# Allegro board CLAYR6.brd
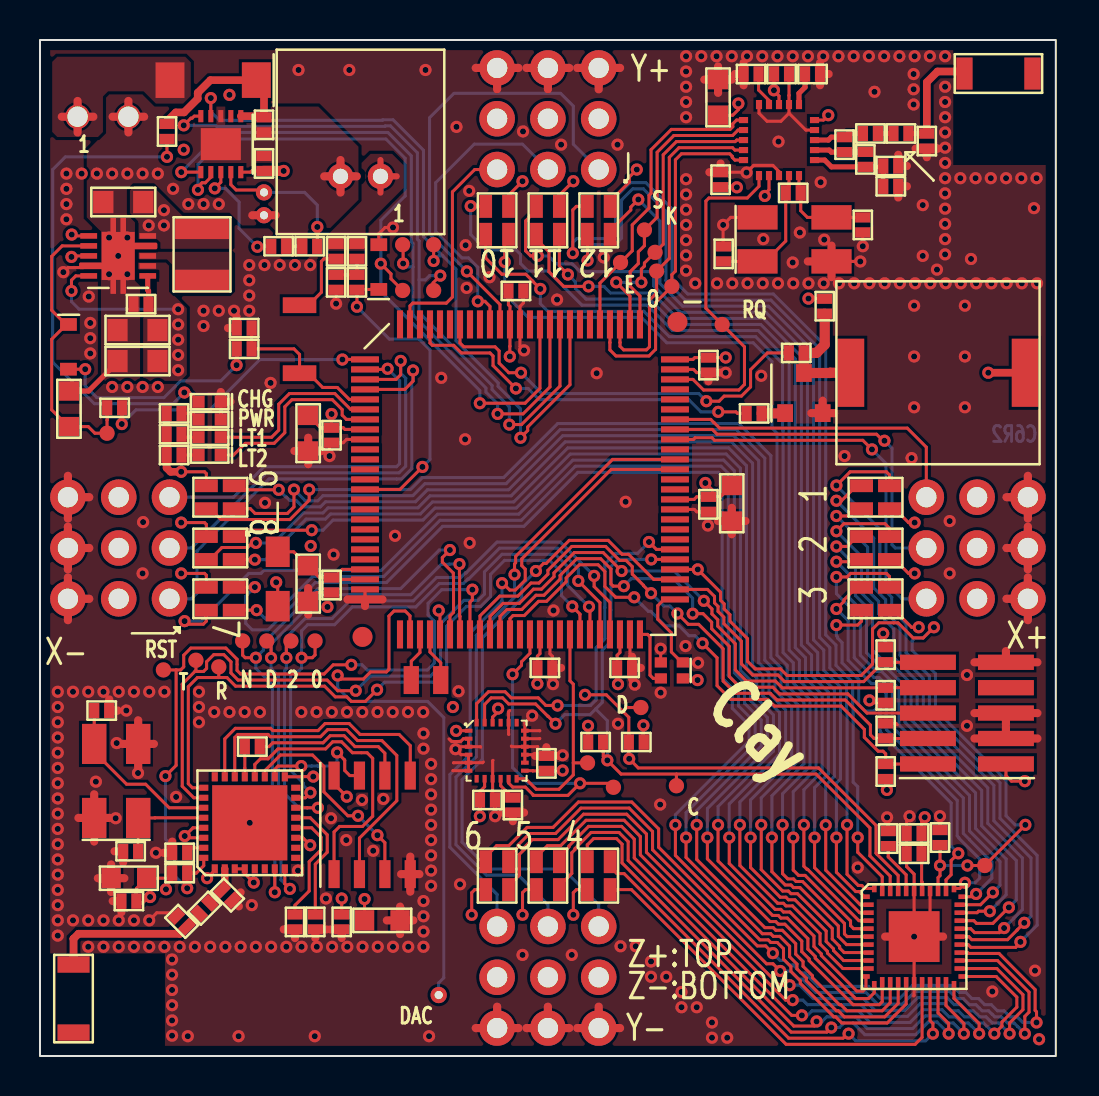
[diagram p0: board, top side]
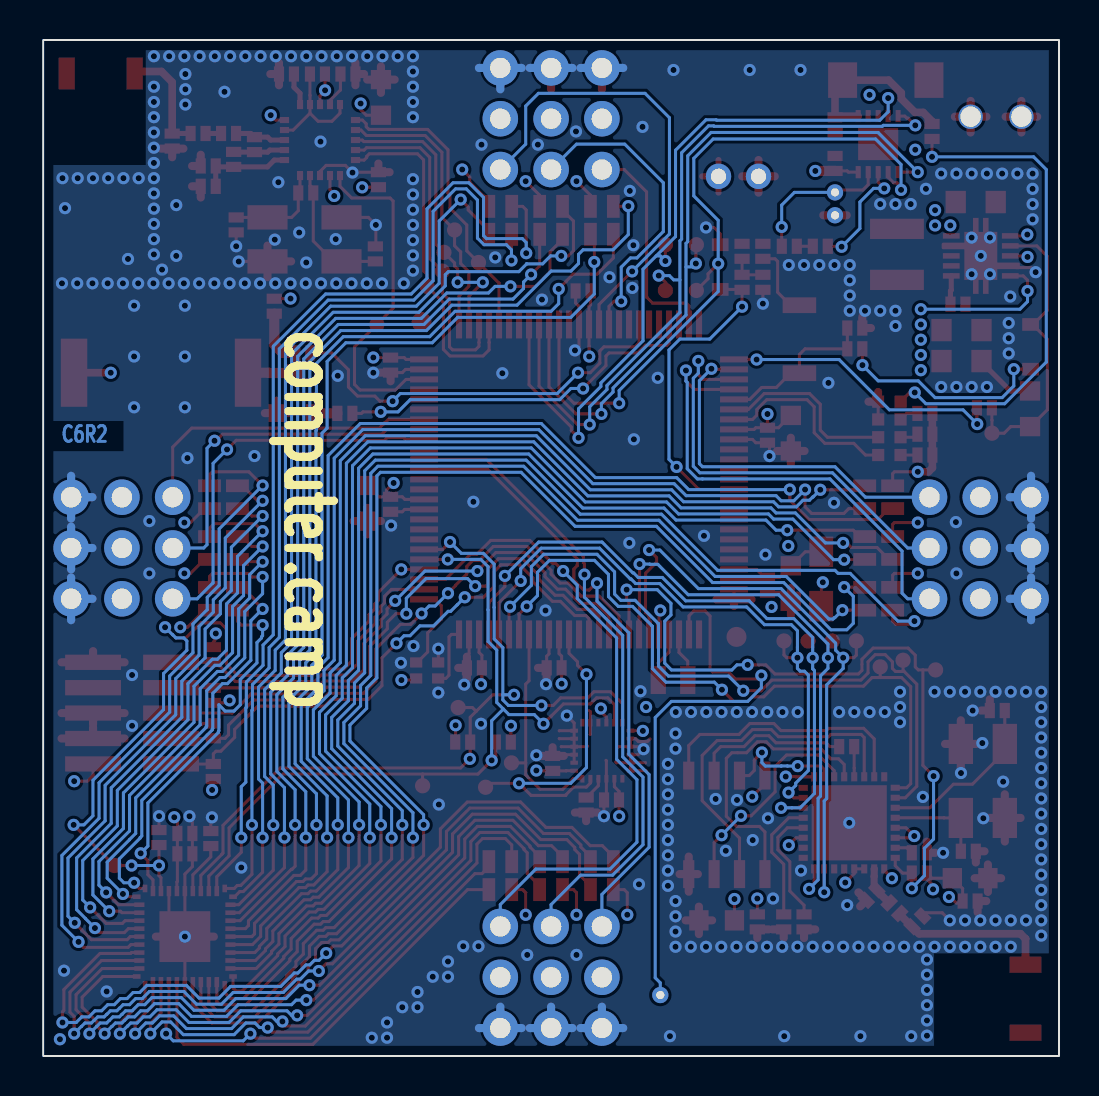
[diagram p1: board, bottom side, seen from below]

Outline 50.8 x 50.8 mm; copper layers: TOP, GND, PWR, BOTTOM. Coordinates in mm from the lower left corner of the outline.

## Placement (name value [footprint] x y rotation side)
AE1  2450AT18A100E  [ANT_1206]  47.93 49.12 0 top
AE2  2450AT18A100E  [ANT_1206]  1.68 2.87 270 top
C1  1uF  [C0402]  11.2 44.63 90 top
C3  1uF  [C0402]  11.2 46.56 270 top
C4  .1uf  [C0402]  25.32 14.63 90 top
C5  .1uf  [C0402]  22.38 12.8 0 top
C6  .1uf  [C0402]  23.65 12.55 270 top
C7  .1uf  [C0402]  34.04 43.81 90 top
C8  .1uf  [C0402]  37.08 49.1 0 top
C9  10uF  [C0603]  33.91 47.93 90 top
C10  1.5pF  [C0402]  43.05 46.13 0 top
C11  1.0pF  [C0402]  44.35 45.75 270 top
C12  2200pF  [C0402]  42.55 44.5 0 top
C13  4.7pF  [C0402]  42.55 43.48 0 top
C14  22pF  [C0402]  34.19 40.11 90 top
C15  22pF  [C0402]  41.15 41.55 270 top
C16  .033uF  [C0402]  35.56 49.1 180 top
C17  1uF  [C0402]  43.71 10.11 180 top
C18  .1uf  [C0402]  43.71 11.13 180 top
C19  .1uf  [C0402]  14.58 23.55 270 top
C20  10uF  [C0603]  13.41 23.62 270 top
C21  .1uf  [C0402]  14.58 31.04 270 top
C22  .1uf  [C0402]  29.24 19.41 0 top
C23  .1uf  [C0402]  23.8 38.25 0 top
C24  .1uf  [C0402]  25.25 19.41 0 top
C25  .1uf  [C0402]  33.43 34.54 270 top
C26  .1uf  [C0402]  33.43 27.58 270 top
C27  10uF  [C0603]  34.59 27.64 270 top
C28  10uF  [C0603]  13.41 31.14 270 top
C29  10uF  [C0805]  4.88 34.75 180 top
C30  10uF  [C0805]  4.17 42.7 180 top
C31  10uF  [C0805]  4.88 36.3 180 top
C32  .1uf  [C0402]  5.05 37.59 180 top
C33  10uF  [C0603]  4.45 8.89 180 top
C34  10uF  [C0603]  17.12 6.78 0 top
C35  .1uf  [C0402]  4.45 7.75 180 top
C36  .1uf  [C0402]  15.09 6.71 270 top
C37  5.6pF  [C0402]  8.23 7.39 225 top
C38  15pF  [C0402]  4.53 10.24 180 top
C39  15pF  [C0402]  3.09 17.27 0 top
C40  10uF  [C0603]  1.45 32.36 90 top
D1  SE20AFJ-M3/6A  [DO_221AC]  8.66 48.79 180 top
D2  4148  [SOD323]  1.42 35.46 270 top
DS1  LB_QH9G_N100_35_1  [LED_0402]  8.48 32.72 180 top
DS2  LB_QH9G_N100_35_1  [LED_0402]  8.48 30.94 180 top
DS3  LB_QH9G_N100_35_1  [LED_0402]  8.48 30.05 180 top
DS4  -  [LTST_C19FD1WT]  27.94 41.78 90 top
DS5  -  [LTST_C19FD1WT]  25.4 41.78 90 top
DS6  -  [LTST_C19FD1WT]  22.86 41.78 90 top
DS7  -  [LTST_C19FD1WT]  9.02 27.94 180 top
DS8  -  [LTST_C19FD1WT]  9.02 25.4 180 top
DS9  -  [LTST_C19FD1WT]  9.02 22.86 180 top
DS10  -  [LTST_C19FD1WT]  27.94 9.02 270 top
DS11  -  [LTST_C19FD1WT]  25.4 9.02 270 top
DS12  -  [LTST_C19FD1WT]  22.86 9.02 270 top
DS13  -  [LTST_C19FD1WT]  41.78 22.86 0 top
DS14  -  [LTST_C19FD1WT]  41.78 25.4 0 top
DS15  -  [LTST_C19FD1WT]  41.78 27.94 0 top
DS16  LB_QH9G_N100_35_1  [LED_0402]  8.48 31.83 180 top
J1  640456-2  [2X1_HEADER_100]  1.88 46.96 0 top
J2  S2B-PH-K-S(LF)(SN)  [JST2_SIDE_PTH]  16.03 46.58 0 top
J3  GPIO_3x3_100  [GPIO_3X3_100]  25.4 3.94 0 top
J4  GPIO_3x3_100  [GPIO_3X3_100]  25.4 46.86 180 top
J5  GPIO_3x3_100  [GPIO_3X3_100]  3.94 25.4 270 top
J6  GPIO_3x3_100  [GPIO_3X3_100]  46.86 25.4 90 top
J7  2x5 SMT  [FTSH_10]  46.35 17.14 90 top
L1  3.9nH  [L0402]  41.53 46.13 0 top
L2  8.2nH  [L0402]  40.23 45.57 90 top
L3  2.7nH  [L0402]  41.27 44.83 270 top
L4  600 Ohm  [FERRITE0805]  11.89 23.85 270 top
L5  2.2uH  [L1210]  8.1 40.08 270 top
L6  DNP  [L0402]  9.37 8.05 135 top
L7  DNP  [L0402]  7.09 6.73 315 top
LS1  PKMCS0909E4000-R1  [PKMCS]  44.91 34.16 0 top
NOREF  -  []  25.4 25.4 0 top
NOREF#2  -  []  0 50.8 0 top
NOREF#3  -  []  0 0 90 top
Q1  3904  [SOT23_3]  38.2 33.15 180 top
R1  30  [R0402]  6.35 46.23 90 top
R2  30  [R0402]  6.71 31.09 180 top
R3  30  [R0402]  6.71 30.05 180 top
R5  10k  [R0402]  13.49 40.49 0 top
R6  3.0k  [R0402]  11.94 40.49 180 top
R7  1.0K  [R0402]  39.24 37.49 90 top
R8  1.0K  [R0402]  37.82 35.15 0 top
R9  1.0K  [R0402]  35.71 32.13 0 top
R10  10k  [R0402]  29.82 15.7 0 top
R11  10k  [R0402]  27.79 15.7 180 top
R12  1M  [R0402]  37.67 43.15 0 top
R13  22k  [R0402]  38.63 49.1 180 top
R14  100k  [R0402]  45.01 10.92 270 top
R15  7.68k  [R0402]  42.42 10.87 270 top
R16  10k  [R0402]  42.29 20.07 270 top
R17  10k  [R0402]  42.29 18.03 90 top
R18  10k  [R0402]  42.29 16.26 270 top
R19  10k  [R0402]  42.29 14.22 90 top
R21  30  [R0402]  6.71 32.13 180 top
R23  10k  [R0402]  12.75 6.71 90 top
R24  10k  [R0402]  13.77 6.71 90 top
R25  10k  [R0402]  6.98 9.14 180 top
R26  200  [R0402]  10.62 15.47 0 top
R27  12k  [R0402]  6.98 10.16 0 top
R28  100k  [R0402]  15.85 40.23 90 top
R29  100k  [R0402]  15.85 38.68 90 top
R30  220k  [R0402]  14.81 38.68 90 top
R31  10k  [R0402]  3.73 32.41 0 top
R32  100k  [R0402]  14.81 40.23 90 top
R33  10k  [R0402]  10.21 35.36 180 top
R34  100k  [R0402]  10.21 36.4 0 top
SW1  B3U-1000P  [TAC_SWITCH_B3U_1000P]  12.98 35.84 270 top
TP1  TP  [TP_030]  30.05 17.42 0 top
TP2  TP  [TP_030]  31.83 13.51 0 top
TP3  TP  [TP_030]  28.68 13.44 0 top
TP4  TP  [TP_030]  27.38 14.66 0 top
TP5  TP  [TP_030]  29.03 39.67 90 top
TP6  TP  [TP_030]  30.23 41.3 90 top
TP7  TP  [TP_030]  30.76 40.18 90 top
TP8  TP  [TP_030]  30.84 39.24 90 top
TP9  TP  [TP_030]  31.6 38.48 90 top
TP10  TP  [TP_030]  34.11 36.58 90 top
TP11  TP  [TP_030]  47.24 9.52 0 top
TP12  TP  [TP_030]  8.94 19.46 0 top
TP13  TP  [TP_030]  7.8 19.79 0 top
TP14  TP  [TP_030]  6.17 19.3 0 top
TP15  TP  [TP_030]  13.75 20.75 0 top
TP16  TP  [TP_030]  12.55 20.75 0 top
TP17  TP  [TP_030]  11.34 20.75 0 top
TP18  TP  [TP_030]  10.13 20.75 0 top
TP19  TP  [TP_030]  19.68 40.56 0 top
TP20  TP  [TP_030]  19.68 38.28 0 top
TP21  TP  [TP_030]  18.14 40.56 0 top
TP22  TP  [TP_030]  18.14 38.28 0 top
TP23  TP  [TP_030]  3.35 31.14 0 top
U1  LM3658  [WSON10_3X3]  9.04 45.59 180 top
U2  MPU9250  [QFN24_3X3]  22.83 15.27 0 top
U3  NRF24L01P  [QFN20_4X4]  36.96 45.8 0 top
U4  IS31FL3236  [QFN44_5X5]  43.71 5.97 0 top
U5  MK64FN1M0VLL12  [QFP100_14X14]  24 28.83 0 top
U6  TPS61201DRCT  [VSON10_3X3]  3.91 40 90 top
U7  ESP8266EX  [QFN32_5X5]  10.49 11.66 90 top
U8  W25Q80DVSNIG  [CL_SOIC8]  16.61 11.56 0 top
W1  26AWG  [WIRE_26AWG]  19.94 3.05 0 top
W2  26AWG  [WIRE_26AWG]  11.2 43.18 0 top
W3  26AWG  [WIRE_26AWG]  11.2 42.04 0 top
Y1  16MHz  [TXC_XTAL_5X3]  37.73 40.83 0 top
Y2  8MHz  [ASCO]  31.6 19.28 180 top
Y3  34.728kHz  [ABS06]  19.3 18.8 0 top
Y4  26MHz  [TXC_XTAL_5X3]  3.81 13.75 90 top
Z1  MM3Z3VST1G  [SOD323]  16.94 39.45 90 top

## Library data of the parts
AE1 AE2 = ANTENNA
C1 C3-C40 = CAP_NP
D1 D2 = DIODE
DS1-DS3 DS16 = LED
DS4-DS15 = LTST_C19FD1WT
J1 J2 = CON_2PIN
J3-J6 = GPIO_3X3_100
J7 = CON_10PIN
L1-L3 L5-L7 = INDUCTOR
L4 = FERRITE
LS1 = BUZZER
Q1 = NPN
R1-R3 R5-R19 R21 R23-R34 = RESISTOR
SW1 = SPST_NO
TP1-TP23 = TESTPOINT
U1 = LM3658
U2 = MPU9250
U3 = NRF24L01
U4 = IS31FL3236
U5 = MK64FN1M0VLL12
U6 = TPS61201
U7 = ESP8266EX
U8 = W25Q
W1-W3 = WIRE
Y1 Y4 = CRYSTAL_4
Y2 = ASCO_OSC
Y3 = CRYSTAL
Z1 = ZENER

## Footprints (pads in the part's own frame, mm; a bottom-side part is the same pattern mirrored in y, then rotated)
2X1_HEADER_100
  round 1.219 hole 1.016: 1(0,0) 2(2.54,0)
ABS06
  rect 0.762x1.397 smd: 1(-0.737,0) 2(0.737,0)
ANT_1206
  rect 0.813x1.6 smd: 1(-1.7,0) 2(1.7,0)
ASCO
  rect 0.61x0.508 smd: 1(-0.55,-0.4) 2(0.55,-0.4) 3(0.55,0.4) 4(-0.55,0.4)
C0402
  rect 0.508x0.762 smd: 1(-0.375,0) 2(0.375,0)
C0603
  rect 0.965x1.016 smd: 1(-0.889,0) 2(0.889,0)
C0805
  rect 1.016x1.118 smd: 1(-1,0) 2(1,0)
CL_SOIC8
  rect 0.559x1.397 smd: 1(-1.905,-2.464) 2(-0.635,-2.464) 3(0.635,-2.464) 4(1.905,-2.464) 5(1.905,2.464) 6(0.635,2.464) 7(-0.635,2.464) 8(-1.905,2.464)
DO_221AC
  rect 1.448x1.778 smd: 1(-2.159,0) 2(2.159,0)
FERRITE0805
  rect 1.524x1.194 smd: 1(-1.359,0) 2(1.359,0)
FTSH_10
  rect 0.762x2.794 smd: 1(-2.54,-1.95) 2(-2.54,1.95) 3(-1.27,-1.95) 4(-1.27,1.95) 5(0,-1.95) 6(0,1.95) 7(1.27,-1.95) 8(1.27,1.95) 9(2.54,-1.95) 10(2.54,1.95)
GPIO_3X3_100
  round 1.778 hole 1.016: 1(-2.54,2.54) 2(0,2.54) 3(2.54,2.54) 4(-2.54,0) 5(0,0) 6(2.54,0) 7(-2.54,-2.54) 8(0,-2.54) 9(2.54,-2.54)
JST2_SIDE_PTH
  round 1.27 hole 0.762: 1(1,-2.6) 2(-1,-2.6)
L0402
  rect 0.508x0.762 smd: 1(-0.375,0) 2(0.375,0)
L1210
  rect 1.016x2.692 smd: 1(-1.275,0) 2(1.275,0)
LED_0402
  rect 0.61x0.61 smd: 1(-0.559,0) 2(0.559,0)
LTST_C19FD1WT
  rect 1.143x0.635 smd: 1(0.699,0.572) 2(-0.699,0.572) 3(-0.699,-0.572) 4(0.699,-0.572)
PKMCS
  rect 1.321x3.404 smd: 1(-4.35,0) 2(4.35,0)
QFN20_4X4
  rect 0.457x0.305 smd: 1(-1.775,1.001) 2(-1.775,0.501) 3(-1.775,0.001) 4(-1.775,-0.499) 5(-1.775,-0.999) 11(1.775,-0.999) 12(1.775,-0.499) 13(1.775,0.001) 14(1.775,0.501) 15(1.775,1.001)
  rect 0.305x0.457 smd: 6(-1.001,-1.775) 7(-0.501,-1.775) 8(-0.001,-1.775) 9(0.499,-1.775) 10(0.999,-1.775) 16(0.999,1.775) 17(0.499,1.775) 18(-0.001,1.775) 19(-0.501,1.775) 20(-1.001,1.775)
QFN24_3X3
  rect 0.381x0.203 smd: 1(-1.402,1) 2(-1.402,0.6) 3(-1.402,0.2) 4(-1.402,-0.2) 5(-1.402,-0.6) 6(-1.402,-1) 13(1.412,-1) 14(1.412,-0.6) 15(1.412,-0.2) 16(1.412,0.2) 17(1.412,0.6) 18(1.412,1)
  rect 0.203x0.381 smd: 7(-1,-1.402) 8(-0.6,-1.402) 9(-0.2,-1.402) 10(0.2,-1.402) 11(0.6,-1.402) 12(1,-1.402) 19(1,1.402) 20(0.6,1.402) 21(0.2,1.402) 22(-0.2,1.402) 23(-0.6,1.402) 24(-1,1.402)
QFN32_5X5
  rect 0.457x0.305 smd: 1(-2.301,1.75) 2(-2.301,1.25) 3(-2.301,0.749) 4(-2.301,0.249) 5(-2.301,-0.251) 6(-2.301,-0.752) 7(-2.301,-1.252) 8(-2.301,-1.753) 17(2.301,-1.753) 18(2.301,-1.252) 19(2.301,-0.752) 20(2.301,-0.251) 21(2.301,0.249) 22(2.301,0.749) 23(2.301,1.25) 24(2.301,1.75)
  rect 0.305x0.457 smd: 9(-1.75,-2.301) 10(-1.25,-2.301) 11(-0.749,-2.301) 12(-0.249,-2.301) 13(0.251,-2.301) 14(0.752,-2.301) 15(1.252,-2.301) 16(1.753,-2.301) 25(1.753,2.301) 26(1.252,2.301) 27(0.752,2.301) 28(0.251,2.301) 29(-0.249,2.301) 30(-0.749,2.301) 31(-1.25,2.301) 32(-1.75,2.301)
  rect 3.759x3.759 smd: 33(0,0)
QFN44_5X5
  rect 0.381x0.229 smd: 1(-2.409,1.994) 11(-2.409,-1.994) 23(2.409,-1.994) 33(2.409,1.994)
  rect 0.508x0.229 smd: 2(-2.276,1.595) 3(-2.276,1.196) 4(-2.276,0.798) 5(-2.276,0.399) 6(-2.276,0) 7(-2.276,-0.399) 8(-2.276,-0.798) 9(-2.276,-1.196) 10(-2.276,-1.595) 24(2.276,-1.595) 25(2.276,-1.196) 26(2.276,-0.798) 27(2.276,-0.399) 28(2.276,0) 29(2.276,0.399) 30(2.276,0.798) 31(2.276,1.196) 32(2.276,1.595)
  rect 0.229x0.381 smd: 12(-1.994,-2.409) 22(1.994,-2.409) 34(1.994,2.409) 44(-1.994,2.409)
  rect 0.229x0.508 smd: 13(-1.595,-2.276) 14(-1.196,-2.276) 15(-0.798,-2.276) 16(-0.399,-2.276) 17(0,-2.276) 18(0.399,-2.276) 19(0.798,-2.276) 20(1.196,-2.276) 21(1.595,-2.276) 35(1.595,2.276) 36(1.196,2.276) 37(0.798,2.276) 38(0.399,2.276) 39(0,2.276) 40(-0.399,2.276) 41(-0.798,2.276) 42(-1.196,2.276) 43(-1.595,2.276)
  rect 2.54x2.54 smd: 45(0,0)
QFP100_14X14
  round 1 smd: (-7.874,-7.874) (7.874,7.874)
  rect 1.397x0.305 smd: 1(-7.75,6) 2(-7.75,5.5) 3(-7.75,5) 4(-7.75,4.5) 5(-7.75,4) 6(-7.75,3.5) 7(-7.75,3) 8(-7.75,2.5) 9(-7.75,2) 10(-7.75,1.5) 11(-7.75,1) 12(-7.75,0.5) 13(-7.75,0) 14(-7.75,-0.5) 15(-7.75,-1) 16(-7.75,-1.5) 17(-7.75,-2) 18(-7.75,-2.5) 19(-7.75,-3) 20(-7.75,-3.5) 21(-7.75,-4) 22(-7.75,-4.5) 23(-7.75,-5) 24(-7.75,-5.5) 25(-7.75,-6) 51(7.75,-6) 52(7.75,-5.5) 53(7.75,-5) 54(7.75,-4.5) 55(7.75,-4) 56(7.75,-3.5) 57(7.75,-3) 58(7.75,-2.5) 59(7.75,-2) 60(7.75,-1.5) 61(7.75,-1) 62(7.75,-0.5) 63(7.75,0) 64(7.75,0.5) 65(7.75,1) 66(7.75,1.5) 67(7.75,2) 68(7.75,2.5) 69(7.75,3) 70(7.75,3.5) 71(7.75,4) 72(7.75,4.5) 73(7.75,5) 74(7.75,5.5) 75(7.75,6)
  rect 0.305x1.397 smd: 26(-6,-7.75) 27(-5.5,-7.75) 28(-5,-7.75) 29(-4.5,-7.75) 30(-4,-7.75) 31(-3.5,-7.75) 32(-3,-7.75) 33(-2.5,-7.75) 34(-2,-7.75) 35(-1.5,-7.75) 36(-1,-7.75) 37(-0.5,-7.75) 38(0,-7.75) 39(0.5,-7.75) 40(1,-7.75) 41(1.5,-7.75) 42(2,-7.75) 43(2.5,-7.75) 44(3,-7.75) 45(3.5,-7.75) 46(4,-7.75) 47(4.5,-7.75) 48(5,-7.75) 49(5.5,-7.75) 50(6,-7.75) 76(6,7.75) 77(5.5,7.75) 78(5,7.75) 79(4.5,7.75) 80(4,7.75) 81(3.5,7.75) 82(3,7.75) 83(2.5,7.75) 84(2,7.75) 85(1.5,7.75) 86(1,7.75) 87(0.5,7.75) 88(0,7.75) 89(-0.5,7.75) 90(-1,7.75) 91(-1.5,7.75) 92(-2,7.75) 93(-2.5,7.75) 94(-3,7.75) 95(-3.5,7.75) 96(-4,7.75) 97(-4.5,7.75) 98(-5,7.75) 99(-5.5,7.75) 100(-6,7.75)
R0402
  rect 0.508x0.762 smd: 1(-0.375,0) 2(0.375,0)
SOD323
  rect 0.635x0.838 smd: 1(-1.118,0) 2(1.118,0)
SOT23_3
  rect 0.787x0.889 smd: 1(0.94,1.003) 2(-0.94,1.003) 3(0,-1.003)
TAC_SWITCH_B3U_1000P
  rect 0.787x1.676 smd: 1(-1.7,0) 2(1.7,0)
TP_030
  round 0.762 smd: 1(0,0)
TXC_XTAL_5X3
  rect 2.007x1.219 smd: 1(-1.85,-1.1) 2(1.85,-1.1) 3(1.85,1.1) 4(-1.85,1.1)
VSON10_3X3
  rect 0.279x0.838 smd: 1(-1,-1.475) 2(-0.5,-1.475) 3(0,-1.475) 4(0.5,-1.475) 5(1,-1.475) 6(1,1.475) 7(0.5,1.475) 8(0,1.475) 9(-0.5,1.475) 10(-1,1.475)
  custom 3.8x1.65 smd: 11(0,0)
WIRE_26AWG
  round 0.813 hole 0.406: 1(0,0)
WSON10_3X3
  rect 0.254x0.61 smd: 1(-1,-1.4) 2(-0.5,-1.4) 3(0,-1.4) 4(0.5,-1.4) 5(0.999,-1.4) 6(0.999,1.4) 7(0.5,1.4) 8(0,1.4) 9(-0.5,1.4) 10(-1,1.4)
  rect 2.007x1.6 smd: 11(0,0)

## Nets
GND: C4.2 C5.2 C6.2 C7.2 C8.2 C9.2 C11.2 C12.2 C13.2 C14.2 C15.2 C16.2 C17.2 C18.2 C19.2 C20.2 C21.2 C22.2 C23.2 C24.2 C25.2 C26.2 C27.2 C28.2 C33.2 C34.2 C35.2 C36.2 C38.2 C39.2 DS1.1(C) DS16.1(C) J3.7(GND2) J3.8(GND1) J3.9(GND) J4.7(GND2) J4.8(GND1) J4.9(GND) J5.7(GND2) J5.8(GND1) J5.9(GND) J6.7(GND2) J6.8(GND1) J6.9(GND) J7.3 J7.5 J7.9 L6.1 L7.1 Q1.2(E) R13.1 R14.1 R15.1 R18.1 R23.1 R24.1 R27.1 R30.1 R34.1 U2.2(NC5) U2.3(NC4) U2.4(NC3) U2.5(NC2) U2.6(NC) U2.9(AD0/SDO) U2.14(NC6) U2.15(NC7) U2.16(NC8) U2.17(NC9) U2.18(GND) U2.20(RESV_GND) U3.8(VSS#8) U3.14(VSS#14) U3.17(VSS#17) U3.20(VSS#20) U4.17(GND#17) U4.37(AD) U4.39(GND#39) U4.45(GND#45) U5.9(VSS#9) U5.24(VREFL) U5.25(VSSA) U5.41(VSS#41) U5.49(VSS#49) U5.60(VSS#60) U5.74(VSS#74) U5.88(VSS#88) U6.9(GND) U7.33(GND) U8.4(GND) Y1.2(GND) Y1.4(GND4) Y2.2(GND) Y4.2(GND) Y4.4(GND4) Z1.2(A)
GND_EARTH: C1.2 C3.2 C29.2 C30.2 C31.2 C32.2 C40.2 J1.2 J2.2 R5.1 R6.1 U1.3(GND#3) U1.11(GND#11) U6.4(PGND) U6.11(PGND2) W3.1
VBAT: C1.1 C30.1 J2.1 L5.1 R28.2 R32.2 U1.10(BATT) U6.5(VIN) U6.6(EN) U6.8(PS)
VBAT_ADC: R29.1 U5.14(ADC0_DP1) Z1.1(K)
VCC: C4.1 C5.1 C7.1 C8.1 C9.1 C17.1 C18.1 C21.1 C22.1 C23.1 C24.1 C25.1 C26.1 C27.1 C28.1 C29.1 C31.1 C33.1 C34.1 C35.1 C36.1 DS4.4(VDD) DS5.4(VDD) DS6.4(VDD) DS7.4(VDD) DS8.4(VDD) DS9.4(VDD) DS10.4(VDD) DS11.4(VDD) DS12.4(VDD) DS13.4(VDD) DS14.4(VDD) DS15.4(VDD) J3.4(VDD) J3.5(VDD1) J3.6(VDD2) J4.4(VDD) J4.5(VDD1) J4.6(VDD2) J5.4(VDD) J5.5(VDD1) J5.6(VDD2) J6.4(VDD) J6.5(VDD1) J6.6(VDD2) J7.1 L4.2 LS1.2 R2.2 R3.2 R7.2 R10.2 R11.2 R16.1 R17.1 R19.1 R21.2 R25.2 U2.1(RESV_VCC) U2.8(VDDIO#8) U2.13(VDDIO#13) U2.22(NCS) U3.7(VDD#7) U3.15(VDD#15) U3.18(VDD#18) U4.38(VCC) U5.8(VDD#8) U5.30(VBAT) U5.40(VDD#40) U5.48(VDD#48) U5.61(VDD#61) U5.75(VDD#75) U5.89(VDD#89) U6.2(VOUT) U6.10(FB) U7.1(VDDA#1) U7.3(VDD3P3#3) U7.4(VDD3P3#4) U7.11(VDDPST#11) U7.17(VDDPST#17) U7.29(VDDD) U7.30(VDDA#30) U8.8(VCC) Y2.4(VDD)
VDD_RTC: U7.5(VDD_RTC)
#CS: U7.20(SD_CMD) U8.1(C\S\)
#HOLD: U7.18(SD_DATA_2) U8.7(H\O\L\D\)
#RST: J7.10 R16.2 U5.52(RESET_B)
#WP: U7.19(SD_DATA_3) U8.3(W\P\)
ADC0_DM0/ADC1_DM3: U5.19(ADC0_DM0/ADC1_DM3)
ADC0_DM1: U5.15(ADC0_DM1)
ADC0_DP0/ADC1_DP3: U5.18(ADC0_DP0/ADC1_DP3)
ADC1_DM0/ADC0_DM3: U5.21(ADC1_DM0/ADC0_DM3)
ADC1_DM1: U5.17(ADC1_DM1)
ADC1_DP0/ADC0_DP3: U5.20(ADC1_DP0/ADC0_DP3)
ADC1_DP1: U5.16(ADC1_DP1)
BUTTONOUT: R33.1 R34.2 SW1.2 U5.5(PTE4/LLWU_P2/SPI1_PCS0/UART3_TX)
BUZZER_IN: R9.1 U5.97(PTD4/LLWU_P14/SPI0_PCS1/UART0_R)
BUZZER_LINE: R8.1 U5.94(PTD1/ADC0_SE5B/SPI0_SCK/UART2_C)
CLK: R26.2 U8.6(CLK)
DAC_OUT: U5.27(DAC0_OUT/CMP1_IN3/ADC0_SE23) W1.1
DI: U7.23(SD_DATA_1) U8.5(DI)
DO: U7.22(SD_DATA_0) U8.2(DO)
EN_B: TP19.1 U1.4(USB_SEL) U5.83(PTC11/LLWU_P11/ADC1_SE7B/I2C1_S)
FSYNC: TP3.1 U2.11(FSYNC) U5.39(PTA5/USB_CLKIN/FTM0_CH2/MII0_RX)
GPIO1: J6.3(GPIO3) U5.69(PTB23/SPI2_SIN/SPI0_PCS5/FB_AD2)
GPIO2: J6.2(GPIO2) U5.68(PTB22/SPI2_SOUT/FB_AD29/CMP2_OU)
GPIO3: J6.1(GPIO1) U5.67(PTB21/SPI2_SCK/FB_AD30/CMP1_OUT)
GPIO4: J3.3(GPIO3) U5.53(PTB0/LLWU_P5/ADC0_SE8/ADC1_SE8/)
GPIO5: J3.2(GPIO2) U5.65(PTB19/CAN0_RX/FTM2_CH1/I2S0_TX_)
GPIO6: J3.1(GPIO1) U5.64(PTB18/CAN0_TX/FTM2_CH0/I2S0_TX_)
GPIO7: J5.3(GPIO3) U5.4(PTE3/ADC0_DM2/ADC1_SE7A/SPI1_SI)
GPIO8: J5.2(GPIO2) U5.3(PTE2/LLWU_P1/ADC0_DP2/ADC1_SE6A)
GPIO9: J5.1(GPIO1) U5.2(PTE1/LLWU_P0/ADC1_SE5A/SPI1_SOU)
GPIO10: J4.3(GPIO3) U5.99(PTD6/LLWU_P16/ADC0_SE7B/SPI0_PC)
GPIO11: J4.2(GPIO2) U5.91(PTC17/UART3_TX/ENET0_1588_TMR1/)
GPIO12: J4.1(GPIO1) U5.90(PTC16/UART3_RX/ENET0_1588_TMR0/)
IMU_INT: TP4.1 U2.12(INT) U5.43(PTA13/LLWU_P4/CMP2_IN1/CAN0_RX/)
LED1: DS2.1(C) U5.6(PTE5/SPI1_PCS2/UART3_RX/SDHC0_D)
LED2: DS3.1(C) U5.7(PTE6/SPI1_PCS3/UART3_CTS_B/I2S0)
MESH_#CS: TP6.1 U3.2(CSN) U5.76(PTC4/LLWU_P8/SPI0_PCS0/UART1_TX)
MESH_CE: TP5.1 U3.1(CE) U5.80(PTC8/ADC1_SE4B/CMP0_IN2/FTM3_CH)
MESH_IRQ: TP10.1 U3.6(IRQ) U5.73(PTC3/LLWU_P7/CMP1_IN1/SPI0_PCS1)
MISO0: TP9.1 U3.5(MISO) U5.79(PTC7/CMP0_IN1/SPI0_SIN/USB_SOF_)
MOSI0: TP8.1 U3.4(MOSI) U5.78(PTC6/LLWU_P10/CMP0_IN0/SPI0_SOU)
POWERON: R31.2 U5.1(PTE0/ADC1_SE4A/SPI1_PCS1/UART1_)
PTA0/JTAG_TCLK/SWD_CLK/EZP_CLK/: J7.4 R18.2 U5.34(PTA0/JTAG_TCLK/SWD_CLK/EZP_CLK/)
PTA1/JTAG_TDI/EZP_DI/UART0_RX/F: J7.8 R17.2 U5.35(PTA1/JTAG_TDI/EZP_DI/UART0_RX/F)
PTA2/JTAG_TDO/TRACE_SWO/EZP_D0/: J7.6 U5.36(PTA2/JTAG_TDO/TRACE_SWO/EZP_D0/)
PTA3/JTAG_TMS/SWD_DIO/UART0_RTS: J7.2 R19.2 U5.37(PTA3/JTAG_TMS/SWD_DIO/UART0_RTS)
PTA4/LLWU_P3/NMI_B/EZP_CS_B/FTM: U5.38(PTA4/LLWU_P3/NMI_B/EZP_CS_B/FTM)
PTA12/CMP2_IN0/CAN0_TX/FTM1_CH0: U5.42(PTA12/CMP2_IN0/CAN0_TX/FTM1_CH0)
PTA18/EXTAL0/FTM0_FLT2/FTM_CLKI: U5.50(PTA18/EXTAL0/FTM0_FLT2/FTM_CLKI) Y2.3(OUT)
PTA19/XTAL0/FTM1_FLT0/FTM_CLKIN: U5.51(PTA19/XTAL0/FTM1_FLT0/FTM_CLKIN) Y2.1(EN)
PTB9/SPI1_PCS1/UART3_CTS_B/FB_A: U5.57(PTB9/SPI1_PCS1/UART3_CTS_B/FB_A)
PTB10/ADC1_SE14/SPI1_PCS0/UART3: U5.58(PTB10/ADC1_SE14/SPI1_PCS0/UART3)
PTB11/ADC1_SE15/SPI1_SCK/UART3_: U5.59(PTB11/ADC1_SE15/SPI1_SCK/UART3_)
PTB16/SPI1_SOUT/UART0_RX/FTM_CL: U5.62(PTB16/SPI1_SOUT/UART0_RX/FTM_CL)
PTB17/SPI1_SIN/UART0_TX/FTM_CLK: U5.63(PTB17/SPI1_SIN/UART0_TX/FTM_CLK)
PTB20/SPI2_PCS0/FB_AD31/CMP0_OU: U5.66(PTB20/SPI2_PCS0/FB_AD31/CMP0_OU)
PTC0/ADC0_SE14/SPI0_PCS4/PDB0_E: U5.70(PTC0/ADC0_SE14/SPI0_PCS4/PDB0_E)
PTC1/LLWU_P6/ADC0_SE15/SPI0_PCS: U5.71(PTC1/LLWU_P6/ADC0_SE15/SPI0_PCS)
PTC2/ADC0_SE4B/CMP1_IN0/SPI0_PC: U5.72(PTC2/ADC0_SE4B/CMP1_IN0/SPI0_PC)
PTC9/ADC1_SE5B/CMP0_IN3/FTM3_CH: U5.81(PTC9/ADC1_SE5B/CMP0_IN3/FTM3_CH)
PTC10/ADC1_SE6B/I2C1_SCL/FTM3_C: U5.82(PTC10/ADC1_SE6B/I2C1_SCL/FTM3_C)
PTC15/UART4_TX/FB_AD24: U5.87(PTC15/UART4_TX/FB_AD24)
PTC18/UART3_RTS_B/ENET0_1588_TM: U5.92(PTC18/UART3_RTS_B/ENET0_1588_TM)
PTD0/LLWU_P12/SPI0_PCS0/UART2_R: U5.93(PTD0/LLWU_P12/SPI0_PCS0/UART2_R)
PTD2/LLWU_P13/SPI0_SOUT/UART2_R: U5.95(PTD2/LLWU_P13/SPI0_SOUT/UART2_R)
PTD3/SPI0_SIN/UART2_TX/FTM3_CH3: U5.96(PTD3/SPI0_SIN/UART2_TX/FTM3_CH3)
PTD5/ADC0_SE6B/SPI0_PCS2/UART0_: U5.98(PTD5/ADC0_SE6B/SPI0_PCS2/UART0_)
PTD7/CMT_IRQ/UART0_TX/FTM0_CH7/: U5.100(PTD7/CMT_IRQ/UART0_TX/FTM0_CH7/)
SCK0: TP7.1 U3.3(SCK) U5.77(PTC5/LLWU_P9/SPI0_SCK/LPTMR0_AL)
SCL0: R11.1 TP2.1 U2.23(SCL/SCLK) U4.42(SCL) U5.55(PTB2/ADC0_SE12/I2C0_SCL/UART0_R)
SDA0: R10.1 TP1.1 U2.24(SDA/SDI) U4.41(SDA) U5.56(PTB3/ADC0_SE13/I2C0_SDA/UART0_C)
SDB: R14.2 TP11.1 U4.36(SDB) U5.54(PTB1/ADC0_SE9/ADC1_SE9/I2C0_SDA)
STAT1: TP22.1 U1.7(STAT1) U5.86(PTC14/UART4_RX/FB_AD25)
STAT2: TP21.1 U1.6(STAT2) U5.85(PTC13/UART4_CTS_B/FB_AD26)
USB0_DM: U5.11(USB0_DM)
USB0_DP: U5.10(USB0_DP)
USB_SEL: TP20.1 U1.5(EN_B) U5.84(PTC12/UART4_RTS_B/FB_AD27/FTM3_)
USBPWR: U1.2(USBPWR)
VOUT33: U5.12(VOUT33)
VREF_OUT/CMP1_IN5/CMP0_IN5/ADC1: U5.26(VREF_OUT/CMP1_IN5/CMP0_IN5/ADC1)
VREGIN: U5.13(VREGIN)
WIFI_#RESET: R25.1 TP14.1 U5.33(PTE26/ENET_1588_CLKIN/UART4_CTS) U7.32(EXT_RSTB)
WIFI_CHIP_EN: TP18.1 U5.31(PTE24/ADC0_SE17/UART4_TX/I2C0__) U7.7(CHIP_EN)
WIFI_GPIO0: TP15.1 U5.46(PTA16/SPI0_SOUT/UART0_CTS_B/UAR) U7.15(GPIO0)
WIFI_GPIO2: TP16.1 U5.47(PTA17/ADC1_SE17/SPI0_SIN/UART0_) U7.14(GPIO2)
WIFI_RX: TP12.1 U5.44(PTA14/SPI0_PCS0/UART0_TX/MII0_R) U7.25(U0RXD)
WIFI_TX: TP13.1 U5.45(PTA15/SPI0_SCK/UART0_RX/MII0_TX) U7.26(U0TXD)
WIFI_XPD_DCDC: TP17.1 U5.32(PTE25/ADC0_SE18/UART4_RX/I2C0_S) U7.8(XPD_DCDC)
N00198: LS1.1 Q1.3(C) R7.1 R8.2
N00230: R13.2 U3.16(IREF)
N00299: R5.2 U1.9(TS) W2.1
N00337: R6.2 U1.8(ISET)
N00355: L5.2 U6.3(L)
N00409: C15.1 R12.2 U3.10(XC1) Y1.3
N00478: C32.1 U6.1(VAUX)
N00507: C14.1 R12.1 U3.9(XC2) Y1.1
N00519: Q1.1(B) R9.2
N00975: R15.2 U4.40(R_EXT)
N01220: DS16.2(A) R21.1
N01340: C16.1 U3.19(DVDD)
N01687: DS5.1(BLUE) U4.2(OUT4)
N01689: DS5.2(RED) U4.3(OUT5)
N01691: DS5.3(GREEN) U4.4(OUT6)
N01749: DS6.1(BLUE) U4.5(OUT7)
N01755: DS6.2(RED) U4.6(OUT8)
N01761: DS6.3(GREEN) U4.7(OUT9)
N02099: R26.1 U7.21(SD_CLK)
N02614: C6.1 U2.10(REGOUT)
N02615: DS7.1(BLUE) U4.8(OUT10)
N02621: DS7.2(RED) U4.9(OUT11)
N02627: DS7.3(GREEN) U4.10(OUT12)
N02738: DS8.1(BLUE) U4.11(OUT13)
N02744: DS8.2(RED) U4.12(OUT14)
N02750: DS8.3(GREEN) U4.13(OUT15)
N02922: DS9.1(BLUE) U4.14(OUT16)
N02928: DS9.2(RED) U4.15(OUT17)
N02934: DS9.3(GREEN) U4.16(OUT18)
N03097: C12.1 C13.1 L3.2 U3.11(VDD_PA)
N03359: DS10.1(BLUE) U4.18(OUT19)
N03365: DS10.2(RED) U4.19(OUT20)
N03371: DS10.3(GREEN) U4.20(OUT21)
N03382: C38.1 U7.28(XTAL_IN) Y4.1
N03395: C39.1 U7.27(XTAL_OUT) Y4.3
N03481: DS11.1(BLUE) U4.21(OUT22)
N03487: DS11.2(RED) U4.22(OUT23)
N03493: DS11.3(GREEN) U4.23(OUT24)
N03631: DS12.1(BLUE) U4.24(OUT25)
N03637: DS12.2(RED) U4.25(OUT26)
N03643: DS12.3(GREEN) U4.26(OUT27)
N03677: L2.1 L3.1 U3.12(ANT1)
N03692: L1.1 L2.2 U3.13(ANT2)
N03711: C10.1 L1.2
N03715: AE1.1(IN) C10.2 C11.1
N03833: DS15.1(BLUE) U4.27(OUT28)
N03839: DS15.2(RED) U4.28(OUT29)
N03845: DS15.3(GREEN) U4.29(OUT30)
N03893: DS14.1(BLUE) U4.30(OUT31)
N03895: DS14.2(RED) U4.31(OUT32)
N03897: DS14.3(GREEN) U4.32(OUT33)
N03935: DS13.1(BLUE) U4.33(OUT34)
N03941: DS13.2(RED) U4.34(OUT35)
N03947: DS13.3(GREEN) U4.35(OUT36)
N04099: R24.2 U7.13(MTDO)
N04101: R23.2 U7.12(MTCK)
N05845: DS4.3(GREEN) U4.1(OUT3)
N05857: DS4.2(RED) U4.44(OUT2)
N05869: DS4.1(BLUE) U4.43(OUT1)
N05962: C37.1 L6.2 U7.2(LNA)
N05976: AE2.1(IN) C37.2 L7.2
N06603: U5.29(EXTAL32) Y3.2
N06615: U5.28(XTAL32) Y3.1
N08855: C3.1 D1.1(C) R1.2 U1.1(CHG_IN)
N08912: D1.2(A) J1.1
N0016014: R27.2 U7.31(RES12K)
N18669: C19.1 C20.1 L4.1 U5.22(VDDA) U5.23(VREFH)
N33119: DS2.2(A) R2.1
N33141: DS3.2(A) R3.1
N33179: DS1.2(A) R1.1
N58949: D2.2(A) R33.2
N59151: R32.1 SW1.1
N69311: C40.1 D2.1(C) R31.1 TP23.1 U6.7(UVLO)
N100511: R28.1 R29.2 R30.2

Pads without a net: AE1 2; AE2 2; J7 7; U2 7 19 21; U7 6 9 10 16 24

## Via types
v1: diameter 0.61, hole 0.305, TOP to BOTTOM, 539 vias

## Routing (per net, layer and track width the routed paths; a pad name or vN(x,y) marks a point on that pad's centre or on a via; arc(x,y) is an arc through that point)
GND: length 252.8
  TOP w0.152: v1(45,11.99) 45,11.92 45.01,11.91 R14.1 ; v1(24.61,17.02) 24.25,16.65 U2.18 ; U2.5 U2.6 20.66,14.27 20.65,14.27 ; U2.5 U2.4 21.05,15.07 v1(20.78,15.34) 20.9,15.47 U2.3 ; U2.5 20.69,14.67 20.68,14.66 ; U2.5 22.13,14.67 22.17,14.71 ; U2.18 U2.17 ; U2.18 24.98,16.27 24.99,16.26 ; L7.1 6.66,7.16 5.84,7.16 v1(5.46,6.78) ; Y1.2 40.79,39.73 40.79,39.73 v1(41.02,39.73) ; v1(34.29,34.16) 33.43,34.16 C25.2 32.84,34.17 32.68,34.33 U5.74 ; U2.15 U2.16 ; U2.15 25.26,15.07 C4.2 ; U2.15 U2.14 ; U2.16 23.6,15.47 23.57,15.49 ; U2.16 24.89,15.47 24.89,15.47 ; U2.16 U2.17 ; v1(43.71,5.97) U4.39 43.71,9.09 43.34,9.47 C17.2 C18.2 43.34,11.86 43.47,11.99 v1(43.48,11.99) ; v1(43.71,5.97) 44.51,6.77 U4.37 ; v1(43.71,5.97) U4.17 43.71,3.02 43.69,3 ; 24.99,15.87 24.98,15.87 U2.17 ; 23.49,17.27 23.43,17.21 U2.20 23.43,16.09 23.44,16.08 ; C15.2 v1(41.15,40.49) ; v1(1.17,39.19) 1.4,39.42 2.16,39.42 2.24,39.51 U6.9 ; 22.05,15.44 22.03,15.47 U2.3 ; R18.1 42.81,16.63 42.88,16.56 ; v1(24.21,35.28) 24,35.48 U5.88 24,37.48 24.17,37.65 C23.2 ; C8.2 37.46,48.03 37.46,48.03 U3.17 37.46,47.14 ; 37.46,47.14 37.05,46.74 36.36,46.74 35.96,47.14 U3.20 ; 37.46,47.14 38.3,46.3 U3.14 ; Y1.4 34.54,41.93 v1(34.16,41.55) 34.16,40.51 C14.2 ; U5.49 29.5,20.12 29.61,20.02 29.61,19.96 ; DS16.1 DS1.1 8.94,32.82 ; v1(17.65,41.43) 17.26,41.43 16.94,41.11 Z1.2 ; C20.2 13.85,23.17 C19.2 ; 22.66,14.78 22.63,14.76 U2.9 22.63,12.92 C5.2 22.76,12.8 v1(22.76,11.99) ; C22.2 29.74,19.27 v1(29.74,18.57) ; v1(31.04,20.36) 31.04,19.69 Y2.2 ; U5.41 25.5,20.11 25.62,19.99 C24.2 25.65,19.37 v1(25.65,18.59) ; R30.1 v1(14.81,37.62) ; 20.45,15.86 20.5,15.82 20.59,15.72 21.03,15.72 21.17,15.87 U2.2 U2.3 ; U5.60 32.72,27.33 32.84,27.21 C26.2 ; U5.24 U5.25 ; 34.29,44.19 35.31,44.19 v1(35.33,44.17) 35.69,44.53 36.65,44.53 36.96,44.22 U3.8 ; v1(42.36,11.93) 42.38,11.91 42.38,11.79 42.42,11.76 R15.1 ; U5.9 15.33,30.83 15.16,30.66 C21.2 14.48,30.56 v1(14.48,30) 14.18,30.3 13.46,30.3 C28.2
  TOP w0.406: 39.58,38.94 Y1.2 ; Y1.2 39.58,40.52 ; Y1.2 38.4,39.73 ; 4.12,15.6 Y4.2 ; Y4.2 4.91,16.79 ; Y4.2 4.91,14.42 ; Y4.2 5.7,15.6 ; J4.9 23.93,49.4 ; J4.9 22.86,48.34 ; J4.9 21.79,49.4 ; 33.91,48.16 C9.2 ; C9.2 34.6,48.82 ; C9.2 33.91,49.48 ; C9.2 33.22,48.82 ; J6.9 49.4,29.01 ; J6.9 49.4,26.87 ; J6.9 48.34,27.94 ; C11.2 44.91,45.37 ; C11.2 44.35,44.94 ; C11.2 43.79,45.37 ; 23.65,11.74 C6.2 ; C6.2 24.21,12.17 ; C6.2 23.09,12.17 ; 21.79,1.4 J3.7 ; J3.7 23.93,1.4 ; J3.7 22.86,2.46 ; J6.7 49.4,23.93 ; J6.7 49.4,21.79 ; J6.7 48.34,22.86 ; 1.4,24.33 J5.8 ; J5.8 1.4,26.47 ; J5.8 2.46,25.4 ; 3.73,10.24 C38.2 4.16,9.68 ; C27.2 34.59,27.41 ; C27.2 34.59,26.09 ; C27.2 33.91,26.75 ; C27.2 35.28,26.75 ; 13.41,22.07 C20.2 13.41,23.39 ; 9.4,36.4 R34.1 9.84,36.96 ; C22.2 30.04,19.41 ; C22.2 29.61,19.96 ; C22.2 29.61,18.85 ; U8.4 18.97,9.09 ; U8.4 18.06,9.09 ; U8.4 18.52,9.97 ; U8.4 18.52,8.22 ; C33.2 4.22,8.89 ; C33.2 3.56,9.58 ; C33.2 3.56,8.2 ; C33.2 2.9,8.89 ; J4.7 29.01,49.4 ; J4.7 27.94,48.34 ; J4.7 26.87,49.4 ; 3.46,17.83 C39.2 3.89,17.27 ; Q1.2 39.14,32.77 ; Q1.2 39.71,32.14 ; Q1.2 38.57,32.14 ; 48.34,25.4 J6.8 ; J6.8 49.4,26.47 ; J6.8 49.4,24.33 ; 24.33,49.4 J4.8 ; J4.8 26.47,49.4 ; J4.8 25.4,48.34 ; 10.03,8.18 L6.1 9.94,7.48 ; 12.19,6.33 R23.1 12.75,5.9 ; U5.25 17.13,22.83 ; U5.25 16.25,22.5 ; U5.25 15.38,22.83 ; J5.7 1.4,29.01 ; J5.7 1.4,26.87 ; J5.7 2.46,27.94 ; 14.33,6.33 R24.1 13.77,5.9 ; C34.2 18.01,7.47 ; C34.2 18.01,6.1 ; C34.2 17.35,6.78 ; C34.2 18.67,6.78 ; 6.18,10.16 R27.1 6.61,10.72 ; 42.27,5.97 v1(43.71,5.97) 45.16,5.97 ; 33.43,33.74 C25.2 33.99,34.17 ; 13.41,29.59 C28.2 ; C28.2 14.1,30.25 ; C28.2 12.72,30.25 ; C28.2 13.41,30.91 ; C4.2 25.32,15.44 ; C4.2 25.88,15.01 ; C4.2 24.76,15.01 ; 46.73,17.14 J7.5 ; J7.5 48.3,16.59 ; J7.5 49.88,17.14 ; J5.9 2.46,22.86 ; J5.9 1.4,21.79 ; J5.9 1.4,23.93 ; 25.62,18.85 C24.2 26.05,19.41 ; 39.01,48.54 R13.1 ; R13.1 39.44,49.1 ; R13.1 39.01,49.66 ; J3.9 27.94,2.46 ; J3.9 26.87,1.4 ; J3.9 29.01,1.4 ; 42.92,42.93 C13.2 43.35,43.48 ; 46.73,15.87 J7.3 ; J7.3 48.3,16.43 ; J7.3 49.88,15.87 ; 1.92,11.9 Y4.4 ; Y4.4 2.71,13.09 ; Y4.4 2.71,10.72 ; Y4.4 3.5,11.9 ; J7.9 49.88,19.68 ; J7.9 48.3,20.24 ; J7.9 46.73,19.68 ; 3.64,7.75 C35.2 4.07,7.19 ; 15.09,5.9 C36.2 14.53,6.33 ; 42.92,45.06 C12.2 43.35,44.5 ; 35.19,48.54 C16.2 ; C16.2 34.75,49.1 ; C16.2 35.19,49.66 ; J3.8 25.4,2.46 ; J3.8 26.47,1.4 ; J3.8 24.33,1.4 ; 9.53,32.72 DS1.1 9.04,33.2 ; 34.04,44.62 C7.2 33.48,44.19
  GND w0.406: 21.79,1.4 J3.7 ; J3.7 23.93,1.4 ; J3.7 22.86,2.46 ; 1.4,24.33 J5.8 ; J5.8 2.46,25.4 ; J5.8 1.4,26.47 ; 24.33,1.4 J3.8 ; J3.8 26.47,1.4 ; J3.8 25.4,2.46 ; J6.8 49.4,26.47 ; J6.8 48.34,25.4 ; J6.8 49.4,24.33 ; J5.7 2.46,27.94 ; J5.7 1.4,29.01 ; J5.7 1.4,26.87 ; 26.87,1.4 J3.9 ; J3.9 29.01,1.4 ; J3.9 27.94,2.46 ; J6.7 49.4,23.93 ; J6.7 48.34,22.86 ; J6.7 49.4,21.79 ; J6.9 49.4,29.01 ; J6.9 49.4,26.87 ; J6.9 48.34,27.94 ; 26.87,49.4 J4.7 ; J4.7 27.94,48.34 ; J4.7 29.01,49.4 ; J5.9 1.4,23.93 ; J5.9 2.46,22.86 ; J5.9 1.4,21.79 ; 25.4,48.34 J4.8 ; J4.8 26.47,49.4 ; J4.8 24.33,49.4 ; 22.86,48.34 J4.9 ; J4.9 23.93,49.4 ; J4.9 21.79,49.4
  BOTTOM w0.406: J5.9 2.46,22.86 ; J5.9 1.4,21.79 ; J5.9 1.4,23.93 ; 26.47,49.4 J4.8 24.33,49.4 ; J3.9 27.94,2.46 ; J3.9 29.01,1.4 ; J3.9 26.87,1.4 ; J3.8 26.47,1.4 ; J3.8 25.4,2.46 ; J3.8 24.33,1.4 ; 21.79,1.4 J3.7 ; J3.7 23.93,1.4 ; J3.7 22.86,2.46 ; 48.34,25.4 J6.8 ; J6.8 49.4,26.47 ; J6.8 49.4,24.33 ; 48.34,27.94 J6.9 ; J6.9 49.4,29.01 ; J6.9 49.4,26.87 ; J5.8 1.4,26.47 ; J5.8 1.4,24.33 ; J5.8 2.46,25.4 ; J5.7 2.46,27.94 ; J5.7 1.4,26.87 ; J5.7 1.4,29.01 ; 48.34,22.86 J6.7 ; J6.7 49.4,23.93 ; J6.7 49.4,21.79 ; J4.7 29.01,49.4 ; J4.7 27.94,48.34 ; J4.7 26.87,49.4 ; 21.79,49.4 J4.9 23.93,49.4
  vias: v1(0.89,18.21) v1(0.89,17.45) v1(0.89,16.69) v1(0.89,15.93) v1(0.89,15.16) v1(0.89,14.4) v1(0.89,13.64) v1(0.89,12.88) v1(0.89,12.12) v1(0.89,11.35) v1(0.89,10.59) v1(0.89,9.83) v1(0.89,9.07) v1(0.89,8.31) v1(0.89,7.54) v1(0.89,6.78) v1(0.89,6.02) v1(1.32,41.83) v1(1.65,18.21) v1(1.65,6.78) v1(2.44,37.97) v1(2.41,18.21) v1(2.41,6.78) v1(2.41,5.46) v1(2.51,36.65) v1(2.51,35.89) v1(2.51,35.13) v1(2.79,13.72) v1(3.17,18.21) v1(3.17,6.78) v1(3.17,5.46) v1(3.61,33.45) v1(3.84,15.65) v1(3.78,11.89) v1(3.94,18.21) v1(3.94,6.78) v1(3.94,5.46) v1(4.32,17.27) v1(4.37,33.45) v1(4.7,18.21) v1(4.7,6.78) v1(4.7,5.46) v1(4.9,14.15) v1(5.13,33.45) v1(5.13,24.13) v1(5.16,26.7) v1(5.46,18.21) v1(5.46,5.46) v1(5.8,10.16) v1(5.89,33.45) v1(6.22,18.21) v1(6.22,5.46) v1(6.6,4.83) v1(6.6,4.06) v1(6.6,3.3) v1(6.6,2.54) v1(6.6,1.78) v1(6.6,1.02) v1(6.81,12.95) v1(6.98,5.46) v1(7.39,0.99) v1(7.75,5.46) v1(7.95,18.21) v1(7.95,17.45) v1(7.95,16.69) v1(8.51,5.46) v1(8.71,17.2) v1(9.27,5.46) v1(9.47,17.2) v1(9.93,0.99) v1(10.03,5.46) v1(10.24,17.2) v1(10.49,11.66) v1(10.59,7.54) v1(10.79,5.46) v1(11,17.2) v1(11.25,27.66) v1(11.53,33.66) v1(11.56,5.46) v1(12.32,5.46) v1(12.93,49.3) v1(12.9,9.27) v1(13.07,17.2) v1(13.08,5.46) v1(13.74,0.99) v1(13.83,17.2) v1(13.84,5.46) v1(14.3,7.87) v1(14.59,17.2) v1(14.55,11.89) v1(14.6,5.46) v1(14.68,25.07) v1(15.32,10.79) v1(15.35,17.2) v1(15.37,5.46) v1(15.47,49.3) v1(16.12,17.2) v1(16.1,12.8) v1(16.13,5.46) v1(16.66,10.26) v1(16.88,17.2) v1(16.89,5.46) v1(17.17,12.85) v1(17.64,17.2) v1(17.65,5.46) v1(17.75,26.01) v1(18.4,17.2) v1(18.41,5.46) v1(19.16,17.2) v1(19.18,16.13) v1(19.18,15.37) v1(19.18,7.75) v1(19.18,6.98) v1(19.18,6.22) v1(19.18,5.46) v1(19.28,49.3) v1(19.46,0.99) v1(19.56,14.6) v1(19.56,13.84) v1(19.56,13.08) v1(19.56,12.32) v1(19.56,11.56) v1(19.56,10.79) v1(19.56,10.03) v1(19.56,9.27) v1(19.56,8.51) v1(20.07,33.91) v1(20.83,46.46) v1(20.93,18.24) v1(21.01,8.59) v1(21.29,40.54) v1(21.34,38.4) v1(21.26,30.84) v1(21.46,43.26) v1(21.49,25.65) v1(22.48,38.94) v1(24.13,5.05) v1(24.16,46.23) v1(25.68,22.28) v1(25.86,37.82) v1(26.06,45.57) v1(26.14,15.04) v1(26.59,5.05) v1(27.84,34.14) v1(28.19,39.93) v1(28.88,45.57) v1(28.91,16.61) v1(29.03,5.49) v1(29.29,27.71) v1(29.79,5.49) v1(30.56,4.72) v1(30.56,3.96) v1(31.04,18.17) v1(31.01,12.57) v1(31.32,3.96) v1(32.08,3.2) v1(32.08,2.44) v1(32.31,49.99) v1(32.31,49.23) v1(32.31,48.46) v1(32.31,47.7) v1(32.31,46.94) v1(32.31,43.84) v1(32.31,43.08) v1(32.31,42.32) v1(32.31,41.55) v1(32.31,40.79) v1(32.31,40.03) v1(32.31,39.27) v1(32.28,20.5) v1(32.77,38.63) v1(32.84,2.44) v1(32.91,19.66) v1(33.07,49.99) v1(33.4,26.52) v1(33.6,1.68) v1(33.6,0.91) v1(33.83,49.99) v1(33.86,38.63) v1(34.37,0.91) v1(34.59,49.99) v1(34.62,38.63) v1(35.36,49.99) v1(35.38,38.63) v1(36.12,49.99) v1(36.14,38.63) v1(36.07,34.01) v1(36.17,40.84) v1(36.88,49.99) v1(36.93,45.72) v1(36.91,38.63) v1(37.64,49.99) v1(37.64,39.67) v1(37.67,38.63) v1(38,41.17) v1(38.4,49.99) v1(38.43,38.63) v1(39.04,43.69) v1(39.17,49.99) v1(39.22,40.82) v1(39.19,38.63) v1(39.93,49.99) v1(39.95,38.63) v1(40.23,30) v1(40.69,49.99) v1(40.72,38.63) v1(40.89,9.42) v1(41.45,49.99) v1(41.48,38.63) v1(41.73,48.21) v1(42.21,49.99) v1(42.24,38.63) v1(42.98,49.99) v1(43,38.63) v1(43.59,29.9) v1(43.74,49.99) v1(43.69,49.1) v1(43.69,48.34) v1(43.69,47.57) v1(43.71,37.52) v1(43.71,34.98) v1(43.71,32.44) v1(43.76,38.63) v1(44.15,42.55) v1(44.15,40) v1(44.5,49.99) v1(44.53,38.63) v1(44.86,39.32) v1(45.26,49.99) v1(45.26,48.46) v1(45.26,47.7) v1(45.26,46.94) v1(45.26,46.18) v1(45.26,45.42) v1(45.26,44.65) v1(45.26,43.89) v1(45.26,43.13) v1(45.26,42.37) v1(45.26,41.61) v1(45.26,40.84) v1(45.26,40.08) v1(45.29,38.63) v1(45.49,26.75) v1(45.49,24.13) v1(46.02,43.89) v1(46.05,38.63) v1(46.25,37.52) v1(46.25,34.98) v1(46.25,32.44) v1(46.35,19.05) v1(46.35,16.51) v1(46.56,39.85) v1(46.79,43.89) v1(46.81,38.63) v1(47.55,43.89) v1(47.57,38.63) v1(47.62,3.23) v1(48.31,43.89) v1(48.34,38.63) v1(49.07,43.89) v1(49.1,38.63) v1(49.71,42.39) v1(49.83,43.89) v1(49.76,4.27) v1(49.86,38.63)
GND_EARTH: length 19.6
  TOP w0.152: R6.1 R5.1
  TOP w0.254: C40.2 2.43,33.25 3.88,34.7 C29.2
  TOP w0.406: 10.62,42.04 W3.1 11.79,42.04 ; 3.63,46.96 J1.2 ; J1.2 4.42,47.75 ; J1.2 5.21,46.96 ; J1.2 4.42,46.18 ; 14.21,43.98 J2.2 ; J2.2 15.03,44.8 ; J2.2 15.03,43.17 ; J2.2 15.84,43.98
  GND w0.406: J1.2 4.42,47.75 ; J1.2 5.21,46.96 ; J1.2 3.63,46.96 ; J1.2 4.42,46.18 ; J2.2 15.84,43.98 ; J2.2 15.03,44.8 ; J2.2 14.21,43.98 ; J2.2 15.03,43.17 ; 11.2,41.45 W3.1 ; W3.1 11.79,42.04 ; W3.1 10.62,42.04
  vias: v1(1.32,44.12) v1(1.32,43.36) v1(1.32,42.6) v1(2.08,44.12) v1(2.84,44.12) v1(3.45,40.92) v1(3.45,39.09) v1(3.61,44.12) v1(3.91,40) v1(4.37,44.12) v1(4.37,40.92) v1(4.37,39.09) v1(5.13,44.12) v1(5.89,44.12) v1(6.65,43.36) v1(7.42,42.6) v1(8.18,42.6) v1(8.18,37.26) v1(8.18,36.5) v1(8.94,42.6) v1(8.94,37.26) v1(9.7,37.26) v1(10.46,39.55) v1(10.46,38.79) v1(10.46,38.02) v1(10.46,37.26) v1(11.23,39.55) v1(11.99,39.55) v1(12.75,39.55) v1(13.51,39.55)
VBAT: length 9.6
  TOP w0.152: v1(1.57,39.95) 1.63,40 U6.8 ; C1.1 10.59,44.25 10.53,44.19 U1.10 ; U6.6 1.79,41 1.73,41.07 v1(1.59,41.07)
  TOP w0.305: 17.03,43.17 J2.1 ; J2.1 17.03,44.8 ; J2.1 17.84,43.98
  TOP w0.508: C1.1 v1(12.19,44.25)
  PWR w0.406: J2.1 17.03,44.8 ; J2.1 17.84,43.98 ; J2.1 16.21,43.98 ; J2.1 17.03,43.17
  vias: v1(5.44,41.53) v1(6.2,42.29) v1(6.2,41.53) v1(7.19,45.31) v1(9.47,48.06)
VBAT_ADC: length 15.8
  TOP w0.152: U5.14 18,28.33 v1(19.13,29.45) ; Z1.1 15.87,38.33 R29.1 v1(15.85,37.46)
  BOTTOM w0.152: v1(15.85,37.46) 17.47,35.85 18.96,35.85 19.5,35.3 19.5,29.83 v1(19.13,29.45)
VCC: length 142.1
  TOP w0.152: v1(49.25,13.74) 48.58,13.74 48.3,14.02 J7.1 ; C23.1 23.43,37.56 23.5,37.48 U5.89 23.5,35.49 23.49,35.48 v1(23.49,34.98) ; v1(10.69,8.67) 10.24,9.12 U7.4 U7.3 ; C7.1 34.49,43.44 34.49,43.43 v1(34.85,43.43) ; v1(26.67,43.74) 25.97,43.04 DS5.4 ; v1(7.06,24.13) 8.23,24.13 8.32,24.04 DS9.4 ; U7.17 13.15,13.96 13.16,13.97 v1(13.67,13.97) ; DS12.4 21.74,8.32 21.59,8.17 v1(21.59,7.06) ; U7.11 13.14,10.91 v1(13.51,10.54) ; U4.38 44.11,8.7 44.09,8.73 C17.1 C18.1 44.09,11.78 v1(44.24,11.94) ; DS6.4 23.43,43.04 v1(24.13,43.74) ; U2.8 22.23,13.46 22,13.23 C5.1 22,12.02 22,12.01 v1(22,11.99) ; DS8.4 8.32,26.58 8.23,26.67 v1(7.06,26.67) ; v1(7.06,29.21) 8.23,29.21 8.32,29.12 DS7.4 ; v1(32.88,18.8) 32.23,18.8 Y2.4 ; v1(38.43,37.87) 38.58,37.87 38.59,37.87 R7.2 ; C21.1 14.03,31.41 C28.1 ; C21.1 15.16,31.41 15.25,31.33 U5.8 ; C21.1 v1(14.58,32.1) ; v1(6.3,8.33) 6.3,8.53 6.61,8.85 R25.2 6.36,8.89 C33.1 4.82,8.38 C35.1 4.92,7.65 5.13,7.65 5.44,7.95 v1(5.51,7.95) ; v1(34.29,34.92) 34.28,34.92 C25.1 32.74,34.92 32.65,34.83 U5.75 ; DS14.4 42.74,24.83 43.43,24.13 v1(43.74,24.13) ; U7.1 8.74,9.28 8.36,8.9 v1(8.36,8.89) ; U5.61 32.71,27.83 32.84,27.96 C26.1 33.5,27.96 ; v1(41.48,17.78) 41.6,17.66 R17.1 ; DS4.4 28.51,42.74 29.47,43.69 29.47,43.95 v1(29.84,44.32) ; v1(24.87,18.61) C24.1 24.87,19.99 25,20.12 U5.40 ; v1(39.42,47.04) 39.18,46.8 U3.15 ; v1(22.91,17.37) 22.91,17.22 22.63,16.95 U2.22 ; v1(26.67,7.06) 26.67,8.17 26.82,8.32 DS10.4 ; v1(42.35,13.3) 42.29,13.37 R19.1 ; 33.5,27.96 33.63,28.09 33.63,28.29 v1(33.27,28.65) ; 33.5,27.96 34.03,27.96 C27.1 ; v1(26.14,14.27) 26.04,14.27 26.02,14.26 C4.1 24.65,14.26 24.64,14.27 U2.13 ; R10.2 30.18,15.72 v1(30.18,16.54) ; U2.1 20.89,16.27 20.88,16.26 v1(20.81,16.26) ; U5.48 29,20.18 28.86,20.04 C22.1 28.86,18.76 28.91,18.72 v1(28.91,18.59) ; DS13.4 42.74,22.29 43.59,21.44 v1(43.94,21.44) ; C36.1 v1(15.09,7.87) ; v1(34.92,47.62) 34.92,47.32 34.65,47.04 C9.1 ; v1(19.94,22.28) 20,22.21 U5.30 ; U8.8 14.71,13.6 v1(15.34,12.97) ; DS15.4 42.74,27.37 43.43,26.67 v1(43.74,26.67) ; U3.18 36.96,48 36.7,48.26 v1(36.7,48.29) 36.7,49.09 C8.1 ; v1(1.57,38.25) 1.57,38.79 1.79,39.01 U6.10 ; v1(11.81,23.69) 11.81,23.49 11.89,23.42 L4.2 ; U7.29 7.65,11.41 v1(7.24,11) 7.33,10.91 U7.30 ; v1(36.25,43) 36.25,43.1 36.46,43.31 U3.7 ; R11.2 27.41,16.5 v1(27.41,16.51) ; C34.1 v1(16.23,7.85) ; R16.1 42.29,20.7 42.21,20.78 42.21,20.88 42.17,20.93 v1(42.17,21.13) ; DS11.4 24.28,8.32 24.13,8.17 v1(24.13,7.06)
  TOP w0.381: v1(7.06,29.21) 6.53,29.21 6.33,29.41 R3.2 R2.2 R21.2
  TOP w0.386: LS1.2 v1(47.42,34.16)
  PWR w0.406: 27.94,2.87 J3.6 ; J3.6 29.01,3.94 ; J3.6 27.94,5 ; J3.6 26.87,3.94 ; 2.87,25.4 J5.5 ; J5.5 3.94,26.47 ; J5.5 3.94,24.33 ; J5.5 5,25.4 ; 22.86,45.8 J4.6 ; J4.6 23.93,46.86 ; J4.6 21.79,46.86 ; J4.6 22.86,47.93 ; 25.4,45.8 J4.5 ; J4.5 26.47,46.86 ; J4.5 25.4,47.93 ; J6.6 46.86,29.01 ; J6.6 46.86,26.87 ; J6.6 47.93,27.94 ; J6.6 45.8,27.94 ; 25.4,2.87 J3.5 ; J3.5 25.4,5 ; J3.5 24.33,3.94 ; J3.5 26.47,3.94 ; J5.4 3.94,29.01 ; J5.4 3.94,26.87 ; J5.4 5,27.94 ; J5.4 2.87,27.94 ; J6.4 47.93,22.86 ; J6.4 46.86,23.93 ; J6.4 45.8,22.86 ; J6.4 46.86,21.79 ; J3.4 22.86,5 ; J3.4 23.93,3.94 ; J3.4 22.86,2.87 ; J3.4 21.79,3.94 ; J5.6 3.94,23.93 ; J5.6 3.94,21.79 ; J5.6 5,22.86 ; J5.6 2.87,22.86 ; 45.8,25.4 J6.5 ; J6.5 46.86,24.33 ; J6.5 47.93,25.4 ; J6.5 46.86,26.47 ; J4.4 27.94,47.93 ; J4.4 26.87,46.86 ; J4.4 29.01,46.86 ; J4.4 27.94,45.8
  BOTTOM w0.152: v1(6.91,37.34) 1.96,37.34 1.57,37.72 v1(1.57,38.25)
  vias: v1(6.91,36.58) v1(6.91,35.81) v1(6.91,35.05) v1(6.91,34.29) v1(13.54,25.5) v1(14.38,22.45) v1(20.65,17.45) v1(49.96,0.84)
#CS: length 14.6
  TOP w0.152: U8.1 14.71,11.2 14.98,11.48 16.13,11.48 16.64,11.99 16.64,14.88 16.36,15.16 16.07,15.16 15.63,15.16 15.08,15.71 14.64,15.71 14.28,15.35 11.9,15.35 11.4,14.86 11.02,14.86 10.74,14.58 U7.20
#HOLD: length 6
  TOP w0.152: U7.18 11.74,14.33 11.9,14.5 v1(13.07,14.5) ; U8.7 15.49,14.02 15.24,14.27 15.24,14.78 15.22,14.8 15.22,14.82 v1(14.86,15.18)
  BOTTOM w0.152: v1(14.86,15.18) 14.86,14.67 14.69,14.5 13.89,14.5 13.89,14.5 13.58,14.5 13.58,14.5 v1(13.07,14.5)
#RST: length 16.2
  TOP w0.152: J7.10 42.3,19.68 R16.2 42.16,19.69 41.19,18.72 37.23,18.72 36.9,19.05 35.64,19.05 35.08,19.61 35.08,20.74 34.2,21.62 34.2,21.94 33.91,22.23 33.91,22.48 33.73,22.66 33.73,22.98 33.38,23.33 U5.52
#WP: length 10.8
  TOP w0.152: U7.19 11.24,14.27 12.03,15.05 13.63,15.05 14.2,14.48 14.2,13.21 15.4,12.01 v1(15.9,12.01) ; v1(16.87,11.04) 17.25,10.67 U8.3
  BOTTOM w0.152: v1(16.87,11.04) v1(15.9,12.01)
BUTTONOUT: length 8.3
  TOP w0.152: R34.2 R33.1 12.7,35.36 12.98,35.08 SW1.2 13.42,34.14 14.14,33.43 14.87,33.43 15.47,32.83 U5.5
BUZZER_IN: length 18.5
  TOP w0.152: R9.1 34.88,32.13 34.8,32.21 v1(33.92,32.21) ; v1(23.8,33.38) 22.66,34.52 22.66,35 22.5,35.15 21.07,35.15 20.69,35.53 19.62,35.53 19.5,35.65 U5.97
  BOTTOM w0.152: v1(23.8,33.38) 24.41,33.38 24.97,32.82 32.45,32.82 33.05,32.21 v1(33.92,32.21)
BUZZER_LINE: length 20.4
  TOP w0.152: R8.1 36.37,35.15 35.53,34.32 35.53,33.45 35.08,32.99 34.21,32.99 33.96,32.74 v1(33.32,32.74) ; U5.94 21,35.65 21.2,35.46 22.76,35.46 22.96,35.25 22.96,34.65 23.44,34.16 v1(24.05,34.16)
  BOTTOM w0.152: v1(24.05,34.16) 25.1,33.12 32.94,33.12 v1(33.32,32.74)
CLK: length 8
  TOP w0.152: R26.2 11.45,15.47 11.64,15.66 14.16,15.66 14.51,16.01 15.21,16.01 15.75,15.47 16.92,15.47 17.25,15.14 U8.6
DAC_OUT: length 28.2
  TOP w0.152: v1(14.88,19.02) 14.88,19 15.04,18.85 16.17,18.85 16.53,19.2 17.32,19.2 17.45,19.33 17.45,22 17.7,22.25 18.26,22.25 18.5,22.01 U5.27
  BOTTOM w0.152: W1.1 19.94,3.66 20.19,3.91 20.19,16.92 19.39,17.73 15.57,17.73 14.88,18.41 v1(14.88,19.02)
DI: length 13.5
  TOP w0.152: U7.23 9.24,15.86 9.77,16.38 11.53,16.38 11.64,16.27 13.9,16.27 14.26,16.62 15.46,16.62 16.01,16.08 17.96,16.08 18.52,15.52 U8.5
DO: length 17.6
  TOP w0.152: U7.22 9.74,15.93 9.89,16.08 11.4,16.08 11.52,15.96 14.03,15.96 14.39,16.32 15.33,16.32 15.88,15.77 17.1,15.77 17.84,15.03 17.84,12.76 15.98,10.9 U8.2
EN_B: length 37.5
  TOP w0.152: v1(19.68,39.75) TP19.1 ; U1.4 v1(8.54,47.9) ; v1(24.03,30.91) 24.39,31.27 24.39,31.45 26.5,33.56 U5.83
  BOTTOM w0.152: v1(19.68,39.75) 19.94,40.01 20.14,40.01 ; 20.14,40.01 19.18,40.97 19.18,45.29 17.65,46.81 17.14,46.81 17.12,46.79 8.97,46.79 8.54,47.21 v1(8.54,47.9) ; 20.14,40.01 20.8,39.35 20.8,35.76 22.91,33.65 22.91,33.48 24.03,32.36 v1(24.03,30.91)
FSYNC: length 16.8
  TOP w0.152: TP3.1 28.48,13.63 v1(27.01,13.63) 26.4,13.03 24.66,13.03 24.66,13.06 24.27,13.44 23.64,13.44 23.43,13.65 U2.11 ; U5.39 24.5,20.13 24.08,19.71 24.08,19.53 v1(23.63,19.09)
  BOTTOM w0.152: v1(27.01,13.63) 24.42,13.63 23.63,14.42 v1(23.63,19.09)
GPIO1: length 15.6
  TOP w0.152: J6.3 44.32,30.44 43.37,31.39 33.99,31.39 33.71,31.67 33.7,31.67 33.54,31.83 U5.69
GPIO2: length 17.8
  TOP w0.152: v1(42.23,30.76) 42.16,30.76 41.83,31.09 33.86,31.09 33.62,31.33 U5.68
  BOTTOM w0.152: v1(42.23,30.76) 42.61,30.39 42.61,25.57 42.77,25.4 J6.2
GPIO3: length 19.4
  TOP w0.152: v1(41.61,30.33) 41.15,30.78 33.73,30.78 33.61,30.91 32.76,30.91 32.68,30.83 U5.67
  BOTTOM w0.152: v1(41.61,30.33) 42.3,29.63 42.3,23.66 43.1,22.86 J6.1
GPIO4: length 32.7
  TOP w0.152: U5.53 30.69,23.83 29.43,25.09 29.11,25.09 28.42,25.78 26.47,25.78 25.31,24.63 25.18,24.63 v1(24.8,24.25)
  BOTTOM w0.152: v1(24.8,24.25) 24.09,23.54 24.09,22.87 22.12,20.9 22.12,14.83 21.11,13.82 21.11,10.69 22.45,9.35 26.16,9.35 27.94,7.57 J3.3
GPIO5: length 32.6
  TOP w0.152: U5.65 28.64,29.83 23.79,24.98 23.79,24.66 23.73,24.61 v1(23.73,24.07)
  BOTTOM w0.152: J3.2 25.4,7.57 23.93,9.04 22.33,9.04 20.8,10.57 20.8,13.95 21.82,14.96 21.82,21.03 23.73,22.94 v1(23.73,24.07)
GPIO6: length 31.4
  TOP w0.152: U5.64 28.57,29.33 24.09,24.85 24.09,24.52 24.27,24.34 24.27,23.79 23.77,23.3 23.49,23.3 23.15,23.64 v1(23.1,23.64)
  BOTTOM w0.152: J3.1 22.86,8.08 20.5,10.44 20.5,14.07 21.51,15.09 21.51,21.16 23.1,22.75 v1(23.1,23.64)
GPIO7: length 24.1
  TOP w0.152: v1(18.66,34.28) 18.66,33.74 18.24,33.33 U5.4
  BOTTOM w0.152: v1(18.66,34.28) 18.66,33.74 18.59,33.68 18.59,29.36 18.08,28.85 17.83,28.85 17.83,28.85 11.45,28.85 7.85,25.25 7.85,23.14 7.57,22.86 J5.3
GPIO8: length 21.4
  TOP w0.152: U5.3 17.8,33.83 18.04,34.06 v1(18.04,34.75)
  BOTTOM w0.152: J5.2 7.57,25.4 11.33,29.16 17.96,29.16 18.29,29.49 18.29,33.89 18.04,34.14 v1(18.04,34.75)
GPIO9: length 18.3
  TOP w0.152: U5.2 17.34,34.33 17.37,34.36 v1(17.38,34.36)
  BOTTOM w0.152: v1(17.38,34.36) 17.98,33.76 17.98,29.62 17.83,29.46 11.2,29.46 9.68,27.94 J5.1
GPIO10: length 11.2
  TOP w0.152: J4.3 21.74,44.32 20.62,43.21 20.62,37.95 20.32,37.64 18.64,37.64 18.5,37.51 U5.99
GPIO11: length 15.5
  TOP w0.152: U5.91 22.5,37.48 22.25,37.73 v1(21.89,37.73)
  BOTTOM w0.152: J4.2 24.13,45.59 21.72,45.59 19.79,43.66 19.79,41.22 21.11,39.9 21.43,39.9 21.89,39.44 v1(21.89,37.73)
GPIO12: length 23.5
  TOP w0.152: v1(21.35,39.23) 23,37.58 U5.90
  BOTTOM w0.152: J4.1 26.67,45.59 26.67,47.5 26.04,48.13 20.7,48.13 19.48,46.91 19.48,41.1 v1(21.35,39.23)
IMU_INT: length 11.2
  TOP w0.152: TP4.1 26.67,14.66 ; 26.67,14.66 26.67,18.59 26.5,18.76 U5.43 ; 26.67,14.66 26.67,14.05 25.95,13.33 24.82,13.33 24.29,13.86 U2.12
LED1: length 9.2
  TOP w0.152: DS2.1 11.58,30.94 11.94,31.29 11.94,32.59 12.47,33.12 14.74,33.12 15.54,32.33 U5.6
LED2: length 9.7
  TOP w0.152: DS3.1 9.68,30.05 10.26,30.63 11.71,30.63 12.24,31.17 12.24,32.46 12.6,32.82 14.62,32.82 15.11,32.32 15.11,32.04 15.33,31.83 U5.7
MESH_#CS: length 14.1
  TOP w0.152: U3.2 34.91,46.3 34.64,46.02 31.7,46.02 30.86,45.19 30.86,41.94 TP6.1 30.23,40.51 29.92,40.21 29.92,39.62 29.51,39.22 29.51,38.49 30,38 U5.76
MESH_CE: length 15.1
  TOP w0.152: U5.80 28,38.65 TP5.1 29.62,40.26 29.62,41.55 30.45,42.39 30.45,43.03 30.56,43.13 30.56,45.31 31.57,46.33 34.51,46.33 34.65,46.46 34.65,46.61 34.83,46.8 U3.1
MESH_IRQ: length 17.3
  TOP w0.152: U3.6 35.96,43.48 35.37,42.9 33.45,42.9 33.3,42.75 33.3,37.39 TP10.1 35.23,35.46 35.23,33.58 34.95,33.3 33.18,33.3 32.65,33.83 U5.73
MISO0: length 17.4
  TOP w0.152: U5.79 28.5,35.68 28.5,35.67 28.5,35.31 28.8,35 30.45,35 30.78,35.33 30.78,37.67 TP9.1 31.6,39.07 31.78,39.24 31.78,44.81 32.08,45.11 34.49,45.11 34.62,44.98 34.62,44.93 34.75,44.8 U3.5
MOSI0: length 16.6
  TOP w0.152: U3.4 34.75,45.3 34.63,45.42 31.95,45.42 31.47,44.93 31.47,39.88 TP8.1 30.84,38.15 30.48,37.79 30.48,35.46 30.33,35.31 29.18,35.31 29.01,35.48 29.01,35.67 29,35.68 U5.78
POWERON: length 14.3
  TOP w0.152: v1(4.09,31.6) 4.09,31.67 4.11,31.69 R31.2 ; U5.1 15.19,34.83 15.19,34.82 v1(15.12,34.82)
  BOTTOM w0.152: v1(15.12,34.82) 11,34.82 8.48,32.31 4.8,32.31 v1(4.09,31.6)
PTA0/JTAG_TCLK/SWD_CLK/EZP_CLK/: length 30.3
  TOP w0.152: v1(31.88,22.12) 32.42,21.58 32.94,21.58 34.16,20.36 34.16,18.75 34.77,18.14 36.52,18.14 36.86,17.8 40.27,17.8 41.53,16.54 41.53,16.06 41.71,15.88 R18.2 42.3,15.87 J7.4 ; U5.34 22,22.01 22.99,22.99 23.9,22.99 24.55,23.65 24.95,23.65 25.4,24.1 25.4,24.28 26.59,25.48 28.29,25.48 28.98,24.78 29.31,24.78 29.62,24.47 29.62,24.1 30.18,23.54 30.18,23.52 v1(30.56,23.14)
  BOTTOM w0.152: v1(31.88,22.12) 31.5,22.5 31.2,22.5 v1(30.56,23.14)
PTA1/JTAG_TDI/EZP_DI/UART0_RX/F: length 28.1
  TOP w0.152: 44.41,18.41 42.3,18.41 R17.2 37.11,18.41 36.78,18.75 35.33,18.75 34.77,19.3 34.77,20.61 33.89,21.49 33.89,21.81 33.6,22.1 33.6,22.35 v1(33.2,22.76) ; U5.35 22.5,21.98 23.15,22.63 23.97,22.63 24.68,23.34 25.08,23.34 25.7,23.97 25.7,24.16 26.72,25.17 28.16,25.17 v1(29.09,24.25)
  BOTTOM w0.152: v1(29.09,24.25) 31.71,24.25 v1(33.2,22.76)
PTA2/JTAG_TDO/TRACE_SWO/EZP_D0/: length 29.1
  TOP w0.152: J7.6 41.36,17.14 40.4,18.1 36.99,18.1 36.65,18.44 35,18.44 34.47,18.97 34.47,20.49 33.59,21.36 33.59,21.69 33.16,22.12 v1(32.64,22.12) ; U5.36 23,21.98 23.35,22.33 24.09,22.33 24.8,23.04 25.2,23.04 26.01,23.84 26.01,24.03 26.85,24.87 28.04,24.87 28.55,24.35 28.55,23.6 28.66,23.49 v1(29.2,23.49)
  BOTTOM w0.152: v1(32.64,22.12) 32.64,22.89 31.65,23.87 29.57,23.87 v1(29.2,23.49)
PTA3/JTAG_TMS/SWD_DIO/UART0_RTS: length 28.8
  TOP w0.152: v1(29.72,22.94) 28.79,22.94 28.25,23.48 28.25,24.22 27.91,24.56 26.97,24.56 26.31,23.9 26.31,23.72 25.33,22.73 24.93,22.73 24.22,22.02 23.66,22.02 23.5,21.87 U5.37 ; v1(33.13,20.64) 33.86,19.91 33.86,18.52 34.54,17.83 36.4,17.83 36.73,17.49 40.06,17.49 41.22,16.33 41.22,15.93 41.92,15.24 42.16,15.24 42.29,15.11 R19.2 44.4,14.6 J7.2
  BOTTOM w0.152: v1(33.13,20.64) 32.75,21.01 32.45,21.01 31.96,21.51 31.28,21.51 30.55,22.23 30.42,22.23 30.1,22.56 30.09,22.56 v1(29.72,22.94)
PTA18/EXTAL0/FTM0_FLT2/FTM_CLKI: length 3.1
  TOP w0.152: U5.50 30.38,21.08 30.51,20.96 30.51,19.04 30.67,18.88 Y2.3
PTA19/XTAL0/FTM1_FLT0/FTM_CLKIN: length 4.4
  TOP w0.152: U5.51 31.21,22.83 30.89,22.51 30.89,21.84 31.57,21.16 31.57,20.2 32.1,19.68 Y2.1
SCK0: length 14.8
  TOP w0.152: v1(28.82,38.68) 29.5,38 U5.77 ; v1(30.07,38.68) 30.07,39.34 30.23,39.5 30.23,39.65 TP7.1 31.17,40.59 31.17,45.06 31.83,45.72 34.76,45.72 34.84,45.8 U3.3
  BOTTOM w0.152: v1(30.07,38.68) v1(28.82,38.68)
SCL0: length 40.7
  TOP w0.152: 31.83,14.1 38.81,14.1 41.5,11.4 41.5,10.01 42.52,8.99 U4.42 ; 31.83,14.1 TP2.1 ; 31.83,14.1 29.06,14.1 v1(28.37,14.78) 28.17,14.99 28.17,15.69 R11.1 ; U2.23 22.23,17.58 22.56,17.91 23.13,17.91 23.44,17.6 24.78,17.6 25.4,16.99 25.4,16.99 v1(25.78,16.61) ; U5.55 v1(30.57,24.83)
  BOTTOM w0.152: v1(30.57,24.83) 28.91,24.83 28.55,24.47 28.55,22.31 28.55,22.3 28.55,20.73 28.12,20.3 28.12,17.68 27.79,17.35 ; v1(28.37,14.78) 28.37,16.76 27.79,17.35 ; v1(25.78,16.61) 26.24,17.07 27.51,17.07 27.79,17.35
SDA0: length 42.4
  TOP w0.152: v1(29.46,14.86) 29.44,14.88 R10.1 29.44,16.94 29.15,17.23 ; v1(29.46,14.86) 29.92,14.4 38.94,14.4 41.81,11.53 41.81,10.15 41.86,10.1 41.86,10.08 42.92,9.03 U4.41 ; v1(29.46,14.86) 29.45,14.85 ; U5.56 30.83,25.33 v1(30.45,25.7) ; 29.15,17.23 29.34,17.42 TP1.1 ; 29.15,17.23 28.32,18.06 v1(27.25,18.06) ; U2.24 21.83,17.62 22.43,18.21 23.26,18.21 23.56,17.91 24.92,17.91 25.3,17.53 v1(25.88,17.53)
  BOTTOM w0.152: 27.81,18.06 27.81,17.81 27.53,17.53 v1(25.88,17.53) ; 27.81,18.06 v1(27.25,18.06) ; 27.81,18.06 27.81,20.42 28.24,20.85 28.24,22.43 28.25,22.43 28.25,24.59 28.79,25.13 29.89,25.13 v1(30.45,25.7)
SDB: length 39.7
  TOP w0.152: U4.36 44.91,8.92 45.01,9.02 v1(45.01,9.52) R14.2 ; v1(46.38,9.52) TP11.1 v1(49.28,11.56) ; v1(44.7,21.44) 44.17,20.9 43.66,20.9 42.91,21.66 42.69,21.66 41.95,21.66 41.63,21.35 41.63,19.59 41.07,19.02 37.36,19.02 37.03,19.35 35.76,19.35 35.38,19.74 35.38,20.86 34.5,21.74 34.5,22.07 34.21,22.36 34.21,22.6 34.04,22.78 34.04,23.19 v1(32.89,24.33) U5.54
  BOTTOM w0.152: v1(49.28,11.56) 48.76,11.56 48.31,12.01 48.31,13.79 44.78,17.32 44.78,19.12 43.61,20.29 43.61,20.75 43.77,20.9 44.16,20.9 44.32,21.06 44.33,21.06 v1(44.7,21.44) ; v1(46.38,9.52) v1(45.01,9.52)
STAT1: length 36.9
  TOP w0.152: TP22.1 17.55,38.86 17.55,39.11 v1(17.04,39.62) ; v1(7.9,43.31) 7.9,43.46 8.1,43.66 8.26,43.66 8.54,43.94 U1.7 ; U5.86 25,33.38 24.26,32.64 v1(22,32.64)
  BOTTOM w0.152: v1(22,32.64) 22,33.27 17.04,38.23 v1(17.04,39.62) 17.04,41.78 18.26,43 18.26,44.88 17.29,45.85 9.17,45.85 7.9,44.58 v1(7.9,43.31)
STAT2: length 36.3
  TOP w0.152: v1(18.16,39.62) 18.16,40.54 TP21.1 ; U1.6 v1(7.06,44.19) ; v1(22.89,32.11) 24.15,32.11 25.5,33.45 U5.85
  BOTTOM w0.152: 18.65,39.46 18.33,39.46 v1(18.16,39.62) ; 18.65,39.46 18.65,40.63 18.57,40.72 18.57,45.01 17.4,46.18 9.05,46.18 v1(7.06,44.19) ; 18.65,39.46 18.65,37.05 22.3,33.4 22.3,33.2 22.89,32.61 v1(22.89,32.11)
USB_SEL: length 37.3
  TOP w0.152: v1(20.02,39.02) 20.02,39.01 19.66,38.66 19.66,38.3 TP20.1 ; U1.5 7.71,46.99 7.61,46.89 7.55,46.89 v1(7.19,46.53) ; U5.84 26,33.5 24.08,31.57 v1(23.47,31.57)
  BOTTOM w0.152: v1(20.02,39.02) 19.48,39.02 19.27,38.81 18.96,38.81 ; 18.96,38.81 18.96,40.76 18.87,40.84 18.87,45.16 17.53,46.51 17.27,46.51 17.25,46.48 8.84,46.48 8.79,46.53 v1(7.19,46.53) ; 18.96,38.81 18.96,37.17 22.61,33.53 22.61,33.32 23.47,32.46 v1(23.47,31.57)
WIFI_#RESET: length 37.3
  TOP w0.152: 6.81,19.3 6.81,14.53 v1(6.27,14) ; 6.81,19.3 TP14.1 ; 6.81,19.3 7.04,19.3 7.19,19.46 7.19,20.04 7.55,20.4 9.29,20.4 9.86,19.84 9.86,19.58 9.86,19.28 10.03,19.1 14.21,19.1 14.66,19.56 v1(15.57,19.56) ; v1(21.62,23.32) 21.62,22.81 21.5,22.69 U5.33 ; U7.32 8.19,9.52 7.82,9.14 R25.1 v1(7.36,8.39)
  BOTTOM w0.152: v1(15.57,19.56) 16.1,19.56 16.36,19.3 19.38,19.3 19.72,19.64 19.72,21.74 19.41,22.05 19.41,22.63 20.09,23.32 v1(21.62,23.32) ; v1(6.27,14) 6.27,10.85 6.73,10.39 6.73,9.02 v1(7.36,8.39)
